# Altium PCB PCB1.PcbDoc
Units mm, origin at the board's own origin, x right, y up, seen from the top; angles counter-clockwise.
Board outline 155.07 x 203.58 mm, 2 copper layers (Top Layer, Bottom Layer); 52 components, 40 nets, 160 pads, 1 vias.
Unrouted connection lines stored in the file: 113.
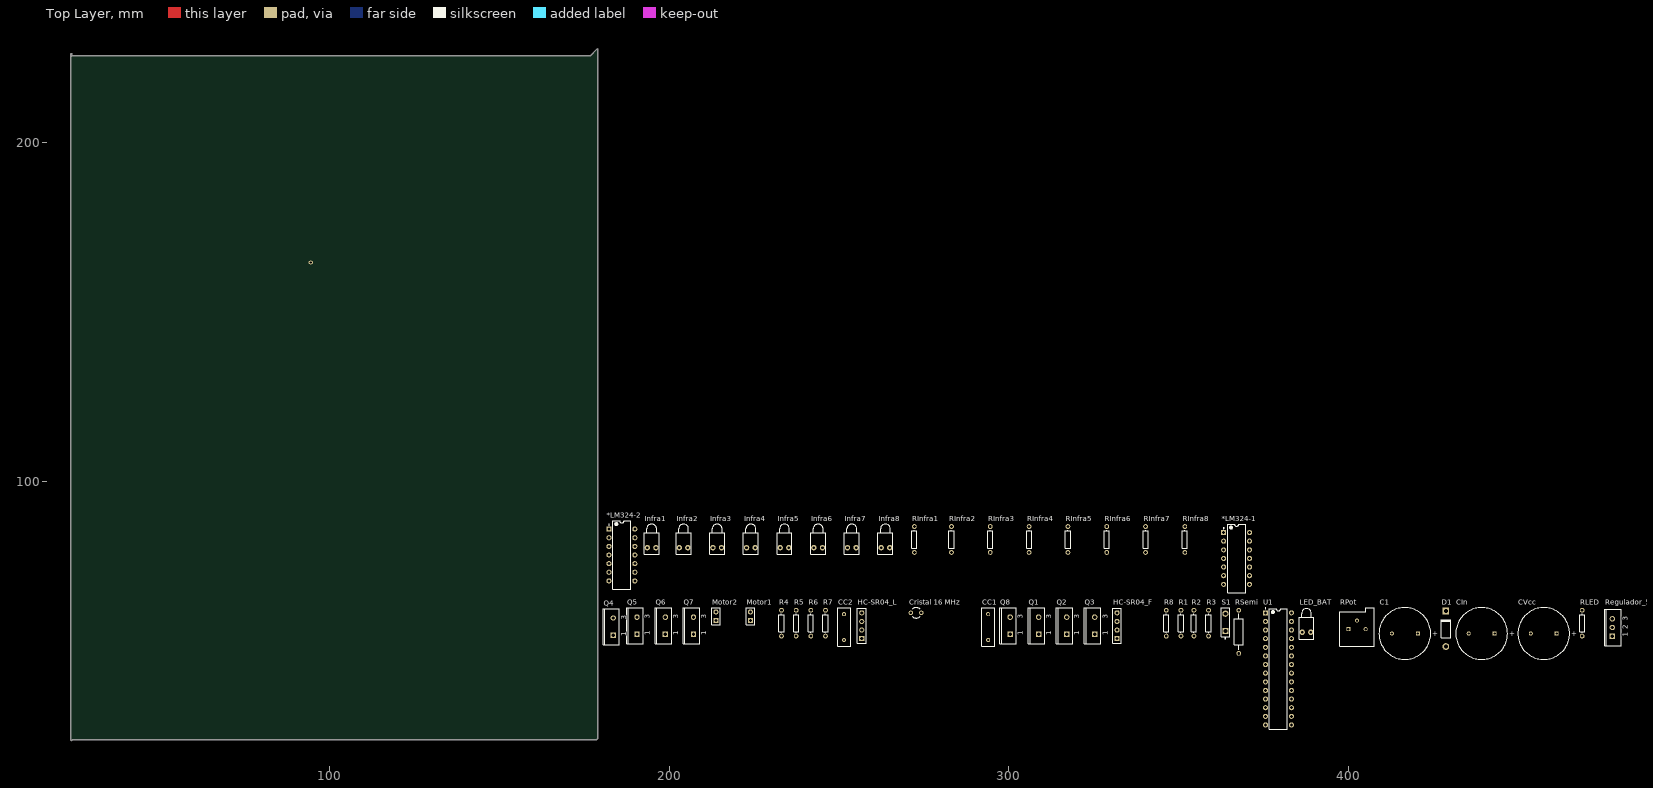
[diagram p0: Top Layer view]
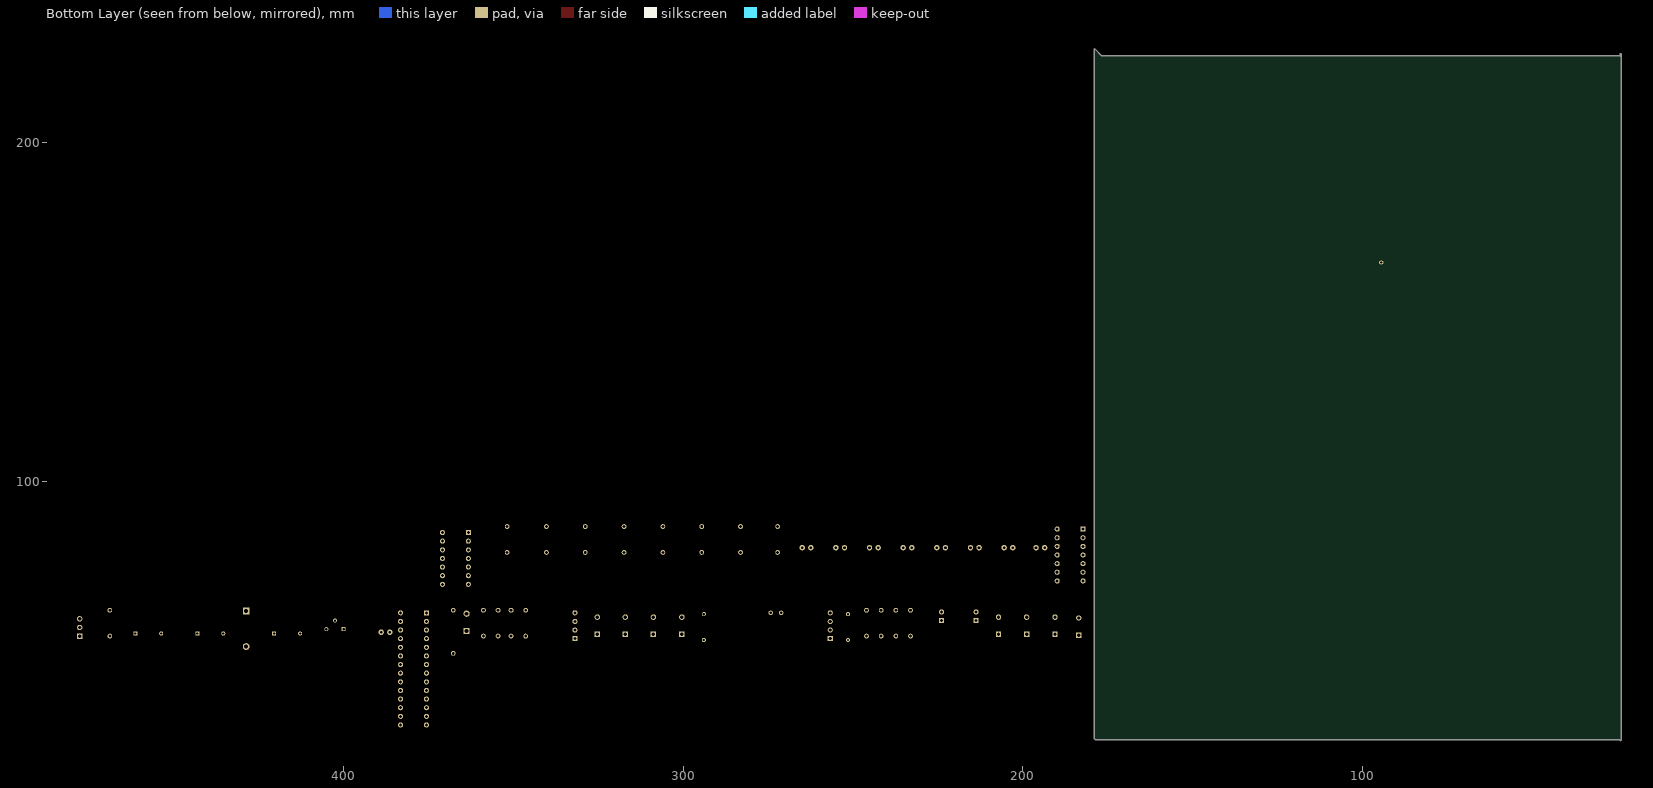
[diagram p1: Bottom Layer view, seen from below]

## Layer stack, top to bottom
Top Solder: solder mask 0.0102, Solder Resist, Dk 3.5
Top Layer: signal copper 0.0356
Dielectric 1: dielectric 0.32, FR-4, Dk 4.8
Bottom Layer: signal copper 0.0356
Bottom Solder: solder mask 0.0102, Solder Resist, Dk 3.5

## Board outline
23.876,24.003 23.876,225.933 cw(c24.003,225.933) 24.13,225.933 24.13,225.312 cw(c24.257,225.298) 24.257,225.425 176.731,225.425 178.726,227.42 178.725,227.42 cw(c178.816,227.33) 178.943,227.33 178.943,24.511 cw(c178.816,24.511) 178.906,24.42 178.906,24.421 178.652,24.167 178.653,24.167 cw(c178.562,24.257) 178.562,24.13 24.31,24.13 24.093,23.913 24.094,23.913 cw(c24.003,24.003)

## Design rules (kind name [scope] priority, off if disabled: settings)
Clearance [All] p1: gap=0.254
PolygonConnect [All] p1: connectstyle=Relief reliefconductorwidth=0.254 reliefentries=4 polygonreliefangle="90 Angle" airgapwidth=0.254
RoomDefinition U_Emisores [InComponentClass('U_Emisores')] p1: confinementstyle=ConfineIn formatcopy=TRUE lockcomponents=FALSE outline 178.943,67.056 374.269,67.056 374.269,90.424 178.943,90.424
RoomDefinition esquema [InComponentClass('esquema')] p2: confinementstyle=ConfineIn formatcopy=TRUE lockcomponents=FALSE outline 178.943,26.924 493.522,26.924 493.522,65.786 178.943,65.786
RoutingVias [All] p1: holewidth=0.711 width=1.27 viastyle="Through Hole" minholewidth=0.711 minwidth=1.27 maxholewidth=0.711 maxwidth=1.27
SolderMaskExpansion [All] p1: expansion=0.102
Width [All] p1: maxlimit=0.254 minlimit=0.254 preferedwidth=0.254
30 further rules are at their usual default settings.

## Classes and differential pairs
component class esquema: *ULN2003A C1 CC1 CC2 CIn "Cristal 16 MHz" CVcc D1 HC-SR04_F HC-SR04_L LED_BAT Motor1 Motor2 Q1 Q2 Q3 Q4 Q5 Q6 Q7 Q8 R1 R2 R3 R4 R5 R6 R7 R8 Regulador_5V RLED RPot RSemi S1 U1
component class U_Emisores: *LM324-1 *LM324-2 Infra1 Infra2 Infra3 Infra4 Infra5 Infra6 Infra7 Infra8 RInfra1 RInfra2 RInfra3 RInfra4 RInfra5 RInfra6 RInfra7 RInfra8

## Components (designator, comment, footprint, x,y, rotation, side; value= is the part's Value field where it differs from the comment)
*LM324-1 "LM324-1" DIP-14 367.03,77.47 r0 top
*LM324-2 "LM324-2" DIP-14 186.055,78.486 r0 top
C1 "Cap Pol1" RB7.6-15 416.56,55.372 r0 top
CC1 "Cap" RAD-0.3 293.878,57.277 r90 top
CC2 "Cap" RAD-0.3 251.46,57.277 r90 top
CIn "Cap Pol1" RB7.6-15 439.166,55.372 r0 top
"Cristal 16 MHz" "XTAL" R38 272.669,61.468 r90 top
CVcc "Cap Pol1" RB7.6-15 457.454,55.372 r0 top
D1 "Diode 1N4001" DO-41 428.625,56.769 r90 top
HC-SR04_F "Header 4" HDR1X4 331.851,53.848 r90 top
HC-SR04_L "Header 4" HDR1X4 256.667,53.848 r90 top
Infra1 "LED1" LED-1 194.818,80.645 r90 top
Infra2 "LED1" LED-1 204.216,80.645 r90 top
Infra3 "LED1" LED-1 214.122,80.645 r90 top
Infra4 "LED1" LED-1 224.028,80.645 r90 top
Infra5 "LED1" LED-1 233.934,80.645 r90 top
Infra6 "LED1" LED-1 243.84,80.645 r90 top
Infra7 "LED1" LED-1 253.746,80.645 r90 top
Infra8 "LED1" LED-1 263.652,80.645 r90 top
LED_BAT "LED1" LED-1 387.604,55.753 r90 top
Motor1 "Header 2" HDR1X2 223.901,59.182 r90 top
Motor2 "Header 2" HDR1X2 213.741,59.182 r90 top
Q1 "Photo NPN" TO-220_A 308.737,57.658 r90 top
Q2 "Photo NPN" TO-220_A 316.992,57.658 r90 top
Q3 "Photo NPN" TO-220_A 325.247,57.658 r90 top
Q4 "Photo NPN" TO-220_A 183.515,57.404 r90 top
Q5 "Photo NPN" TO-220_A 190.5,57.658 r90 top
Q6 "Photo NPN" TO-220_A 198.882,57.658 r90 top
Q7 "Photo NPN" TO-220_A 207.137,57.658 r90 top
Q8 "Photo NPN" TO-220_A 300.355,57.658 r90 top
R1 "Res1" AXIAL-0.3 350.647,58.42 r90 top
R2 "Res1" AXIAL-0.3 354.457,58.42 r90 top
R3 "Res1" AXIAL-0.3 358.775,58.42 r90 top
R4 "Res1" AXIAL-0.3 233.045,58.42 r90 top
R5 "Res1" AXIAL-0.3 237.363,58.42 r90 top
R6 "Res1" AXIAL-0.3 241.681,58.42 r90 top
R7 "Res1" AXIAL-0.3 245.999,58.42 r90 top
R8 "Res1" AXIAL-0.3 346.329,58.42 r90 top
Regulador_5V "L7805ABV" TO-220-AB 477.647,57.15 r90 top
RInfra1 "Res1" AXIAL-0.3 272.161,83.058 r90 top
RInfra2 "Res1" AXIAL-0.3 283.083,83.058 r90 top
RInfra3 "Res1" AXIAL-0.3 294.513,83.058 r90 top
RInfra4 "Res1" AXIAL-0.3 305.943,83.058 r90 top
RInfra5 "Res1" AXIAL-0.3 317.373,83.058 r90 top
RInfra6 "Res1" AXIAL-0.3 328.803,83.058 r90 top
RInfra7 "Res1" AXIAL-0.3 340.233,83.058 r90 top
RInfra8 "Res1" AXIAL-0.3 351.79,83.058 r90 top
RLED "Res1" AXIAL-0.3 468.757,58.42 r90 top
RPot "RPot" VR4 402.463,57.912 r0 top
RSemi "Res Semi" AXIAL-0.5 367.665,55.88 r90 top
S1 "SW-SPST" SPST-2 363.728,58.674 r90 top
U1 "ATmega328-PU" 28P3 379.349,44.958 r0 top

## Footprints (in the part's own frame and the unit in brackets; to place one, negate y for a bottom-side part, rotate by r counter-clockwise, add the part's x,y. Pads: shape width x height; smd on the part's side, far side on the other; paste and mask are expansions set on the pad)
28P3 [mm] "28-Pin Plastic Dual In-Line Package (PDIP)"
  rect 1.5x1.5 hole 0.9: 1(-3.81,16.51)
  round 1.5 hole 0.9: 2(-3.81,13.97) 3(-3.81,11.43) 4(-3.81,8.89) 5(-3.81,6.35) 6(-3.81,3.81) 7(-3.81,1.27) 8(-3.81,-1.27) 9(-3.81,-3.81) 10(-3.81,-6.35) 11(-3.81,-8.89) 12(-3.81,-11.43) 13(-3.81,-13.97) 14(-3.81,-16.51) 15(3.81,-16.51) 16(3.81,-13.97) 17(3.81,-11.43) 18(3.81,-8.89) 19(3.81,-6.35) 20(3.81,-3.81) 21(3.81,-1.27) 22(3.81,1.27) 23(3.81,3.81) 24(3.81,6.35) 25(3.81,8.89) 26(3.81,11.43) 27(3.81,13.97) 28(3.81,16.51)
  silkscreen extent -3.93,-17.7 2.65,17.93, body extent -3.6,-17.65 3.6,17.65, height 4.58
AXIAL-0.3 [mm] "Axial Device, Thru-Hole; 2 Leads; 0.3 in Pin Spacing"
  round 1.4 hole 0.85: 1(-3.81,0) 2(3.81,0)
  silkscreen extent -2.77,-0.76 2.77,0.76
AXIAL-0.5 [mm] "Axial Device, Thru-Hole; 2 Leads; 0.5 in Pin Spacing"
  round 1.4 hole 0.85: 1(-6.35,0) 2(6.35,0)
  silkscreen extent -5.33,-1.27 5.33,1.27
DIP-14 [mm] "DIP; 14 Leads; Row Spacing 7.62 mm; Pitch 2.54 mm"
  rect 1.5x1.5 hole 0.9: 1(-3.81,7.62)
  round 1.5 hole 0.9: 2(-3.81,5.08) 3(-3.81,2.54) 4(-3.81,0) 5(-3.81,-2.54) 6(-3.81,-5.08) 7(-3.81,-7.62) 8(3.81,-7.62) 9(3.81,-5.08) 10(3.81,-2.54) 11(3.81,0) 12(3.81,2.54) 13(3.81,5.08) 14(3.81,7.62)
  silkscreen extent -3.93,-10.1 2.65,10.1, body extent -3.6,-10.1 3.6,10.1, height 5.08
DO-41 [mm] "Diode, Axial; Body 5.2 x 2.7 mm (LxDia. max), Lead Dia. 0.86 mm (max)"
  round 2 hole 1.2: 1(-5.23,0)
  rect 2x2 hole 1.2: 2(5.23,0)
  silkscreen extent -2.65,-1.4 2.75,1.4
HDR1X2 [mm] "Connector; Header; 2 Position"
  rect 1.5x1.5 hole 0.9: 1(0,0)
  round 1.5 hole 0.9: 2(2.54,0)
  silkscreen extent -1.27,-1.27 3.81,1.27
HDR1X4 [mm] "Connector; Header; 4 Position"
  rect 1.5x1.5 hole 0.9: 1(0,0)
  round 1.5 hole 0.9: 2(2.54,0) 3(5.08,0) 4(7.62,0)
  silkscreen extent -1.27,-1.27 8.89,1.27
LED-1 [mm] "LED; 2 Leads"
  round 1.6 hole 0.8: 1(0,1.27) 2(0,-1.27)
  silkscreen extent -2,-2.2 6.95,2.2
R38 [mm] "Crystal, Thru-Hole; 2 Leads; Body 3.1 x 8.2 mm (Dia.xH)"
  round 1.3 hole 0.7: 1(0,1.55) 2(0,-1.55)
  silkscreen extent -1.55,-1.19 1.55,1.17
RAD-0.3 [mm] "Radial Cap, Thru-Hole; 2 Leads; 0.3 in Pin Spacing"
  round 1.2 hole 0.7: 1(-3.81,0) 2(3.81,0)
  silkscreen extent -5.71,-1.91 5.71,1.91
RB7.6-15 [mm] "Polarized Capacitor (Radial); 2 Leads"
  rect 1.2x1.2 hole 0.7: 1(3.81,0)
  round 1.2 hole 0.7: 2(-3.81,0)
  silkscreen extent -7.62,-7.62 7.62,7.62
SPST-2 [mm] "Switch; 2 Leads"
  rect 1.85x1.85 hole 1.1: 1(-2.54,0)
  round 1.85 hole 1.1: 2(2.54,0)
  silkscreen extent -4.89,-1.27 4.28,1.27
TO-220-AB [mm] "TO, Thru-Hole, Vertical, Heatsink Mounted; 3 In-Line Leads; Pitch 2.54 mm"
  rect 1.6x1.6 hole 1: 1(-2.54,0)
  round 1.6 hole 1: 2(0,0) 3(2.54,0)
  silkscreen extent -5.35,-2.55 5.35,2.25
TO-220_A [mm] "TO, Thru-Hole, Vertical, Heatsink Mounted; 3 In-Line Leads (1 Absent); Pitch 2.54 mm"
  rect 1.6x1.6 hole 1: 1(-2.54,0)
  round 1.6 hole 1: 3(2.54,0)
  silkscreen extent -5.3,-1.8 5.3,3
VR4 [mm] "Thru-Hole; 3 Leads"
  rect 1.2x1.2 hole 0.7: 1(-2.54,-1.27)
  round 1.2 hole 0.7: 2(0,1.27) 3(2.54,-1.27)
  silkscreen extent -5.08,-6.35 5.08,5.08

## Part data
*LM324-1 *LM324-2: library part LM324
C1 CIn CVcc: "Polarized Capacitor (Radial)"
CC1 CC2: "Capacitor"
"Cristal 16 MHz": "Crystal Oscillator"
D1: "1 Amp General Purpose Rectifier"
HC-SR04_F HC-SR04_L: "Header, 4-Pin"
Infra1 Infra2 Infra3 Infra4 Infra5 Infra6 Infra7 Infra8 LED_BAT: "Typical RED GaAs LED"
Motor1 Motor2: "Header, 2-Pin"
Q1 Q2 Q3 Q4 Q5 Q6 Q7 Q8: "NPN Phototransistor"
R1 R2 R3 R4 R5 R6 R7 R8 RInfra1 RInfra2 RInfra3 RInfra4 RInfra5 RInfra6 RInfra7 RInfra8 RLED: "Resistor"
Regulador_5V: "Positive Voltage Regulator, 5V, 3-Pin TO-220"
RPot: "Potentiometer"
RSemi: "Semiconductor Resistor"
S1: "Single-Pole, Single-Throw Switch"
U1: "8-bit AVR Microcontroller, 32KB Flash, 1KB EEPROM, 2KB SRAM, 28-pin PDIP, Industrial Grade (-40°C to 85°C)"

## Via types
v1: diameter 1.27, hole 0.711, Top Layer to Bottom Layer, 1 vias

## Nets (pads, with @x,y where several pads share a name; then routed paths per layer and width w, separated by ;. In a path a pad name is that pad's centre, name@x,y a point inside that pad or via, vN(x,y) a via of type N, cw(c..) or ccw(c..) an arc to the next point about the centre after c; other vN are vias at no path point)
ECHOF: HC-SR04_F.3 U1.15
ECHOL: HC-SR04_L.3 U1.17
GND: *LM324-1.11 *LM324-2.11 C1.2 CC1.2 CC2.2 CIn.2 CVcc.2 D1.1 HC-SR04_F.4 HC-SR04_L.4 Infra1.2 Infra2.2 Infra3.2 Infra4.2 Infra5.2 Infra6.2 Infra7.2 Infra8.2 LED_BAT.2 Q1.3 Q2.3 Q3.3 Q4.3 Q5.3 Q6.3 Q7.3 Q8.3 Regulador_5V.2 RPot.1 S1.2 U1.8 U1.22
MPIN1: U1.11
MPIN2: U1.12
Net*ULN2003A_11: Motor2.1
Net*ULN2003A_14: Motor1.1
NetCC1_1: "Cristal 16 MHz.2" CC1.1 U1.9
NetCC2_1: "Cristal 16 MHz.1" CC2.1 U1.10
NetInfra1_1: Infra1.1 RInfra1.1
NetInfra2_1: Infra2.1 RInfra2.1
NetInfra3_1: Infra3.1 RInfra3.1
NetInfra4_1: Infra4.1 RInfra4.1
NetInfra5_1: Infra5.1 RInfra5.1
NetInfra6_1: Infra6.1 RInfra6.1
NetInfra7_1: Infra7.1 RInfra7.1
NetInfra8_1: Infra8.1 RInfra8.1
NetLED_BAT_1: LED_BAT.1 RLED.1
NetRSemi_1: RSemi.1 S1.1 U1.1
P1: *LM324-1.1 U1.4
P2: *LM324-1.7 U1.6
P3: *LM324-1.8 U1.13
P4: *LM324-1.14 U1.14
P5: *LM324-2.1 U1.18
P6: *LM324-2.7 U1.19
P7: *LM324-2.8 U1.23
P8: *LM324-2.14 U1.24
TRIGGERF: HC-SR04_F.2 U1.5
TRIGGERL: HC-SR04_L.2 U1.16
VBAT: CIn.1 D1.2 Motor1.2 Motor2.2 Regulador_5V.1
VCC: *LM324-1.4 *LM324-2.4 C1.1 CVcc.1 HC-SR04_F.1 HC-SR04_L.1 R1.2 R2.2 R3.2 R4.2 R5.2 R6.2 R7.2 R8.2 Regulador_5V.3 RInfra1.2 RInfra2.2 RInfra3.2 RInfra4.2 RInfra5.2 RInfra6.2 RInfra7.2 RInfra8.2 RLED.2 RPot.2 RSemi.2 U1.7 U1.20
VPOT: *LM324-1.2 *LM324-1.6 *LM324-1.9 *LM324-1.13 *LM324-2.2 *LM324-2.6 *LM324-2.9 *LM324-2.13 RPot.3
VPT1: *LM324-1.3 Q1.1 R1.1
VPT2: *LM324-1.5 Q2.1 R2.1
VPT3: *LM324-1.10 Q3.1 R3.1
VPT4: *LM324-1.12 Q4.1 R4.1
VPT5: *LM324-2.3 Q5.1 R5.1
VPT6: *LM324-2.5 Q6.1 R6.1
VPT7: *LM324-2.10 Q7.1 R7.1
VPT8: *LM324-2.12 Q8.1 R8.1
pads on no net: U1.2 U1.3 U1.21 U1.25 U1.26 U1.27 U1.28
copper on no net:
  other v1: 94.488,164.592

## Text inside footprints (layer, text, board x,y; h text height)
C1: Top Overlay "+" at 424.692,54.635 h1.5
CIn: Top Overlay "+" at 447.298,54.635 h1.5
CVcc: Top Overlay "+" at 465.586,54.635 h1.5
Q1: Top Overlay "1" at 312.512,54.868 h1.5 r90; Top Overlay "3" at 312.512,59.698 h1.5 r90
Q2: Top Overlay "1" at 320.767,54.868 h1.5 r90; Top Overlay "3" at 320.767,59.698 h1.5 r90
Q3: Top Overlay "1" at 329.022,54.868 h1.5 r90; Top Overlay "3" at 329.022,59.698 h1.5 r90
Q4: Top Overlay "1" at 187.29,54.614 h1.5 r90; Top Overlay "3" at 187.29,59.444 h1.5 r90
Q5: Top Overlay "1" at 194.275,54.868 h1.5 r90; Top Overlay "3" at 194.275,59.698 h1.5 r90
Q6: Top Overlay "1" at 202.657,54.868 h1.5 r90; Top Overlay "3" at 202.657,59.698 h1.5 r90
Q7: Top Overlay "1" at 210.912,54.868 h1.5 r90; Top Overlay "3" at 210.912,59.698 h1.5 r90
Q8: Top Overlay "1" at 304.13,54.868 h1.5 r90; Top Overlay "3" at 304.13,59.698 h1.5 r90
Regulador_5V: Top Overlay "3" at 482.172,59.19 h1.5 r90; Top Overlay "2" at 482.172,56.65 h1.5 r90; Top Overlay "1" at 482.172,54.36 h1.5 r90